# Altium PCB LED_RING_ZERO_12V_00.PcbDoc
Units mm, origin at the board's own origin, x right, y up, seen from the top; angles counter-clockwise.
Board outline 65 x 30 mm, 2 copper layers (Top Layer, Bottom Layer), stack 0.991 mm thick; 39 components, 31 nets, 120 pads, 0 vias.
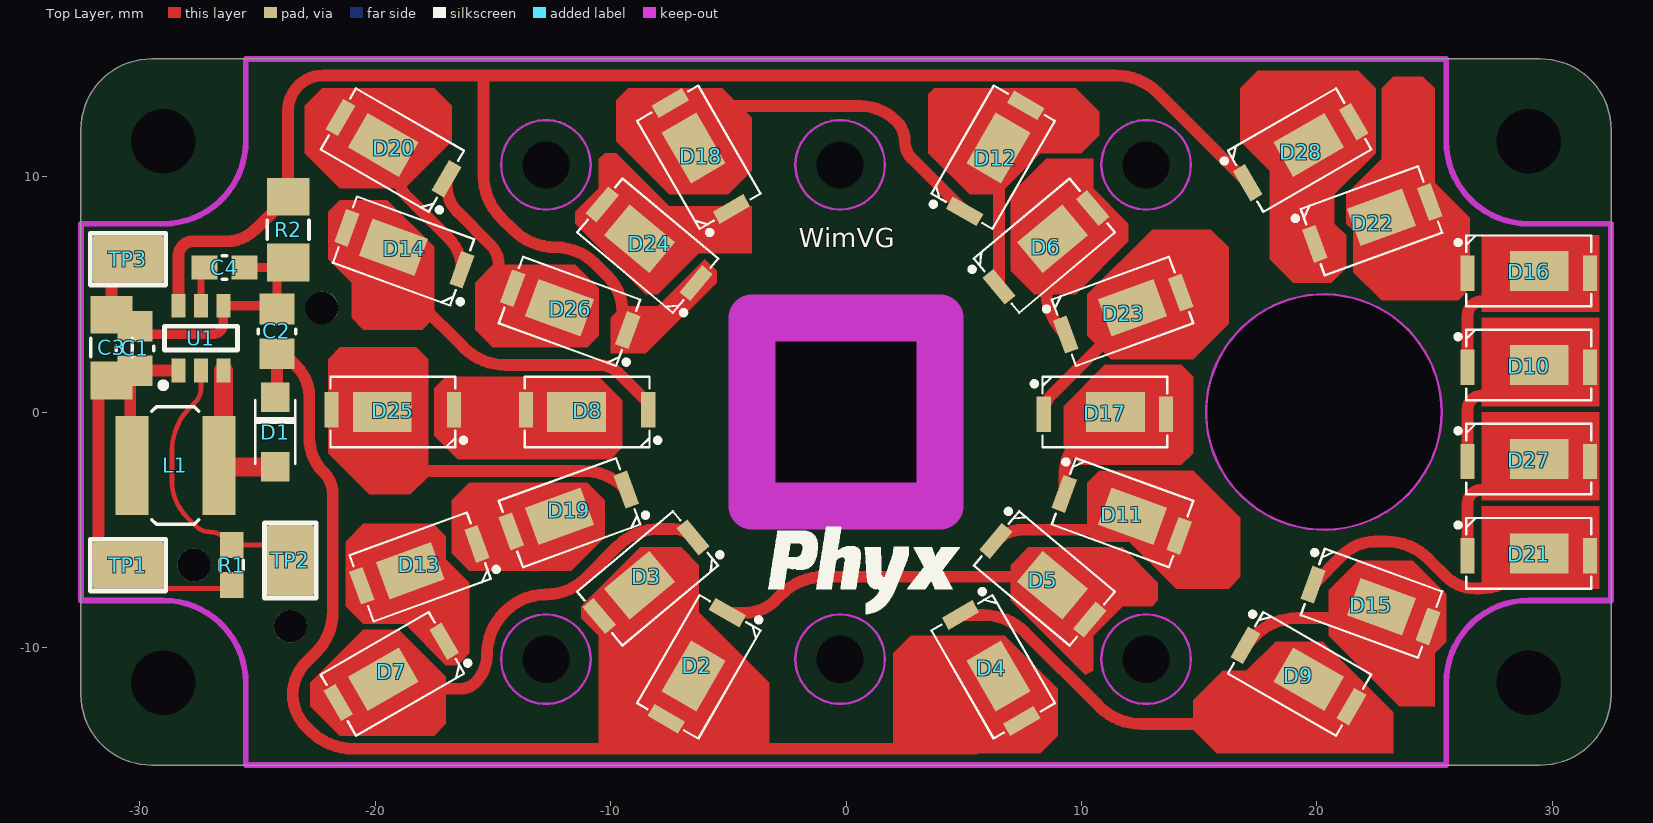
[diagram p0: Top Layer view]
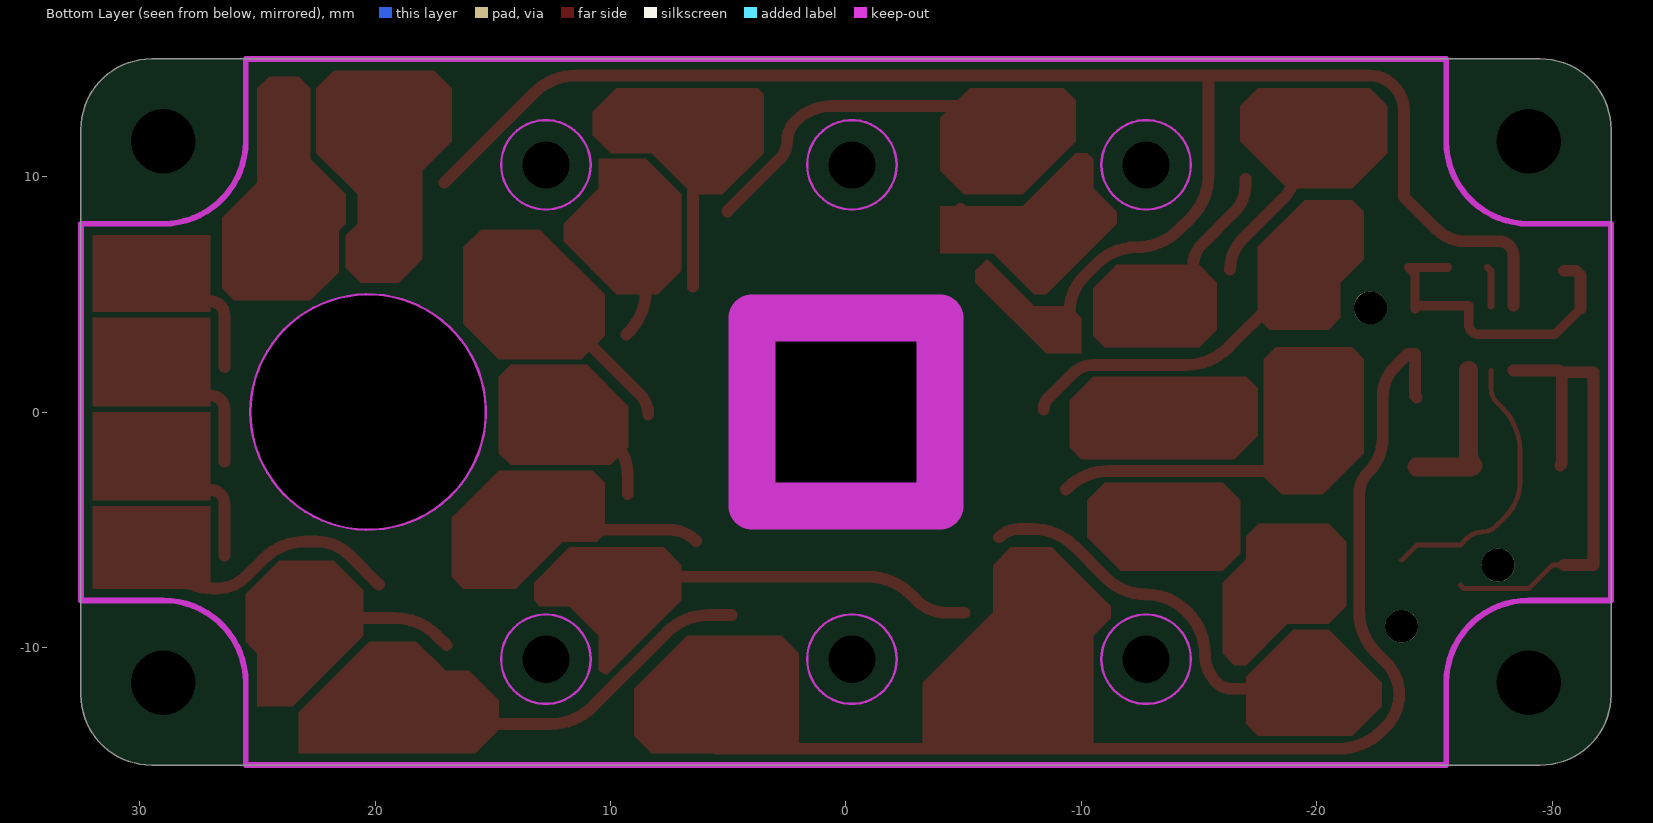
[diagram p1: Bottom Layer view, seen from below]
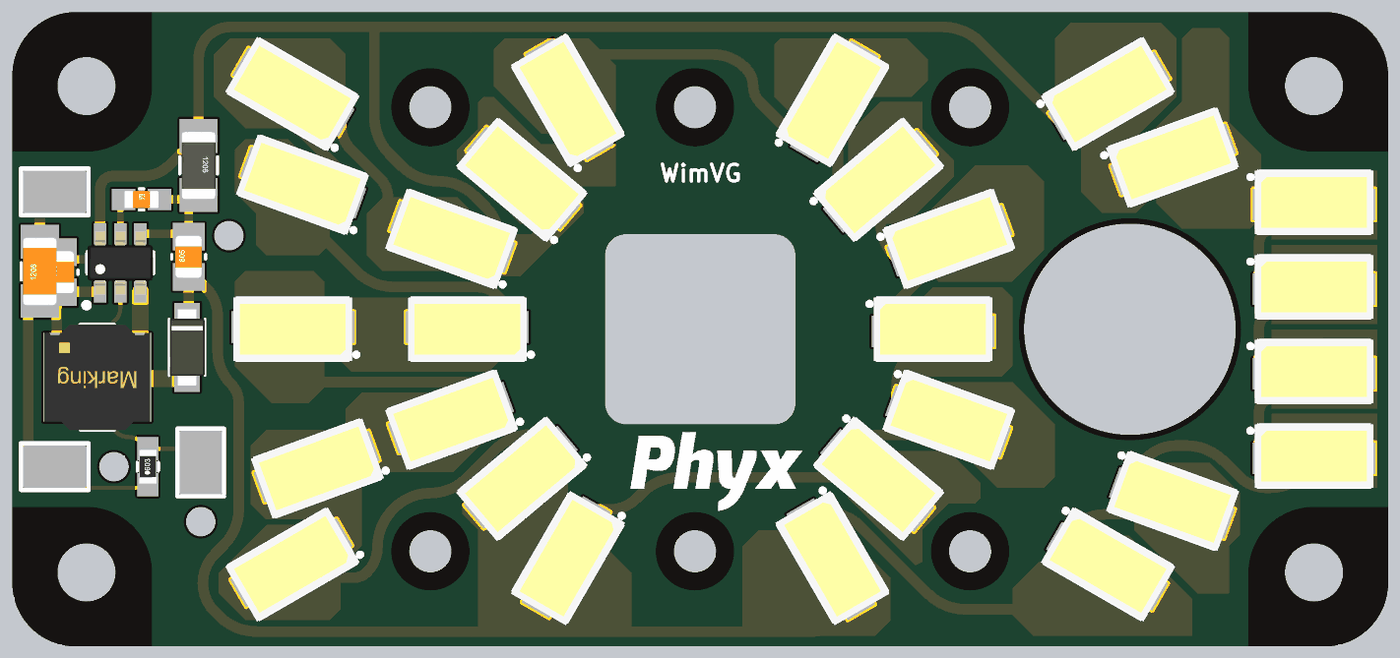
[diagram p2: 3D render of the assembled board from above, using the file's embedded part models]

## Layer stack, top to bottom
Top Solder: solder mask 0.0102, Solder Resist, Dk 3.5
Top Layer: signal copper 0.0356
Dielectric1: core 0.955, Metal, Dk 4.8
Bottom Layer: signal copper (thickness not stored)

## Board outline
-32.5,-12 -32.5,12 cw(c-29.5,12) -29.5,15 29.5,15 cw(c29.5,12) 32.5,12 32.5,-12 cw(c29.5,-12) 29.5,-15 -29.5,-15 cw(c-29.5,-12)
cut-out: 15.3,0 ccw(c20.3,0) 20.3,-5 ccw(c20.3,0) 25.3,0 ccw(c20.3,0) 20.3,5 ccw(c20.3,0)
cut-out: -3.5,4.5 3.5,4.5 cw(c3.5,3.5) 4.5,3.5 4.5,-3.5 cw(c3.5,-3.5) 3.5,-4.5 -3.5,-4.5 cw(c-3.5,-3.5) -4.5,-3.5 -4.5,3.5 cw(c-3.5,3.5) -3.5,4.5

## Design rules (kind name [scope] priority, off if disabled: settings)
Clearance Clearance_GND_POLY [InNamedPolygon('B_GND')] p1: gap=0.4 ignorepadtopadclearanceinfootprint=FALSE except(0: Arc-Hole Track-Hole SMDPad-Hole THPad-Hole Via-Hole Fill-Hole Poly-Hole Region-Hole Text-Hole)
Clearance [All] p2: gap=0.2 ignorepadtopadclearanceinfootprint=FALSE except(0: Arc-Hole Track-Hole SMDPad-Hole THPad-Hole Via-Hole Fill-Hole Poly-Hole Region-Hole Text-Hole)
HoleSize [All] p1: absolutevalues=TRUE maxlimit=10 minlimit=0.025 maxpercent=80.000 minpercent=20.000
PolygonConnect PolygonConnect_VIA [IsVia] p1: connectstyle=Direct reliefconductorwidth=0.254 reliefentries=4 polygonreliefangle="90 Angle" airgapwidth=0.254
PolygonConnect [All] p2: connectstyle=Relief reliefconductorwidth=0.254 reliefentries=4 polygonreliefangle="90 Angle" airgapwidth=0.254
RoutingVias [All] p1: holewidth=0.3 width=0.7 viastyle="Through Hole" minholewidth=0.3 minwidth=0.7 maxholewidth=0.6 maxwidth=1.2
SilkToSolderMaskClearance SilkscreenOverComponentPads [IsPad] p1: minsilkscreentomaskgap=0.254 clearancetoexposedcopper=TRUE
SolderMaskExpansion [All] p1: expansion=0.102
Width [All] p1: maxlimit=2 minlimit=0.15 preferedwidth=0.25
28 further rules are at their usual default settings.

## Components (designator, comment, footprint, x,y, rotation, side; value= is the part's Value field where it differs from the comment)
C1 "CAP_CERAMIC" C0805_N -30.2,2.7 r90 top value="4u7F 25V"
C2 "CAP_CERAMIC" C0805_N -24.171,3.426 r90 top value="1uF 50V"
C3 "CAP_CERAMIC" C1206_N -31.2,2.739 r90 top value="10uF 25V"
C4 "CAP_CERAMIC" C0603_N -26.4,6.139 r0 top value="220nF 50V"
D1 "MBR0540T3G Schottky ULTRAFAST, 500MA, 40V" ON_SOD-123FL -24.246,-0.856 r270 top value=MBR0540T3G
D2 "5630 5630AZLxx Lite ON LED" LED_LM561A -6.25,-10.825 r60 top value=LTW-5630AZL27
D3 "5630 5630AZLxx Lite ON LED" LED_LM561A -8.426,-7.071 r40 top value=LTW-5630AZL27
D4 "5630 5630AZLxx Lite ON LED" LED_LM561A 6.25,-10.825 r120 top value=LTW-5630AZL27
D5 "5630 5630AZLxx Lite ON LED" LED_LM561A 8.426,-7.071 r140 top value=LTW-5630AZL27
D6 "5630 5630AZLxx Lite ON LED" LED_LM561A 8.426,7.071 r220 top value=LTW-5630AZL27
D7 "5630 5630AZLxx Lite ON LED" LED_LM561A -19.269,-11.125 r30 top value=LTW-5630AZL27
D8 "5630 5630AZLxx Lite ON LED" LED_LM561A -11,0 r0 top value=LTW-5630AZL27
D9 "5630 5630AZLxx Lite ON LED" LED_LM561A 19.269,-11.125 r150 top value=LTW-5630AZL27
D10 "5630 5630AZLxx Lite ON LED" LED_LM561A 29,2 r180 top value=LTW-5630AZL27
D11 "5630 5630AZLxx Lite ON LED" LED_LM561A 11.746,-4.275 r160 top value=LTW-5630AZL27
D12 "5630 5630AZLxx Lite ON LED" LED_LM561A 6.25,10.825 r240 top value=LTW-5630AZL27
D13 "5630 5630AZLxx Lite ON LED" LED_LM561A -18.089,-6.584 r20 top value=LTW-5630AZL27
D14 "5630 5630AZLxx Lite ON LED" LED_LM561A -18.794,6.84 r340 top value=LTW-5630AZL27
D15 "5630 5630AZLxx Lite ON LED" LED_LM561A 22.318,-8.123 r160 top value=LTW-5630AZL27
D16 "5630 5630AZLxx Lite ON LED" LED_LM561A 29,6 r180 top value=LTW-5630AZL27
D17 "5630 5630AZLxx Lite ON LED" LED_LM561A 11,0 r180 top value=LTW-5630AZL27
D18 "5630 5630AZLxx Lite ON LED" LED_LM561A -6.25,10.825 r300 top value=LTW-5630AZL27
D19 "5630 5630AZLxx Lite ON LED" LED_LM561A -11.746,-4.275 r20 top value=LTW-5630AZL27
D20 "5630 5630AZLxx Lite ON LED" LED_LM561A -19.269,11.125 r330 top value=LTW-5630AZL27
D21 "5630 5630AZLxx Lite ON LED" LED_LM561A 29,-6 r180 top value=LTW-5630AZL27
D22 "5630 5630AZLxx Lite ON LED" LED_LM561A 22.318,8.123 r200 top value=LTW-5630AZL27
D23 "5630 5630AZLxx Lite ON LED" LED_LM561A 11.746,4.275 r200 top value=LTW-5630AZL27
D24 "5630 5630AZLxx Lite ON LED" LED_LM561A -8.426,7.071 r320 top value=LTW-5630AZL27
D25 "5630 5630AZLxx Lite ON LED" LED_LM561A -19.25,0 r0 top value=LTW-5630AZL27
D26 "5630 5630AZLxx Lite ON LED" LED_LM561A -11.746,4.275 r340 top value=LTW-5630AZL27
D27 "5630 5630AZLxx Lite ON LED" LED_LM561A 29,-2 r180 top value=LTW-5630AZL27
D28 "5630 5630AZLxx Lite ON LED" LED_LM561A 19.269,11.125 r210 top value=LTW-5630AZL27
L1 "TYS5020100M-10" LAIRD_TYS5020 -28.488,-2.27 r0 top value=10uH
R1 "RESISTOR" R0603_N -26.1,-6.5 r90 top value=0R
R2 "RESISTOR" R1206 -23.7,7.75 r270 top value=0R68
TP1 "TEST_PAD" TP_2x3mm -30.5,-6.5 r0 top value="NO BOM"
TP2 "TEST_PAD" TP_2x3mm -23.6,-6.3 r270 top value="NO BOM"
TP3 "TEST_PAD" TP_2x3mm -30.5,6.5 r180 top value="NO BOM"
U1 "TPS61165 38-V Boost WLED Driver with PWM" TI_DBV_R-PDSO-G6 -27.4,3.139 r90 top value=TPS61165DBV

## Footprints (in the part's own frame and the unit in brackets; to place one, negate y for a bottom-side part, rotate by r counter-clockwise, add the part's x,y. Pads: shape width x height; smd on the part's side, far side on the other; paste and mask are expansions set on the pad)
C0603_N [mm] "Low density"
  rect 1.1x1 smd: 1(-0.85,0) 2(0.85,0)
  silkscreen extent -0.1,-0.5 0.1,0.5, body extent -0.8,-0.4 0.8,0.4, height 0.3
C0805_N [mm] "Low density"
  rect 1.3x1.5 smd: 1(-0.95,0) 2(0.95,0)
  silkscreen extent -0.1,-0.8 0.1,0.8, body extent -1,-0.62 1,0.63, height 0.78
C1206_N [mm] "low density"
  rect 1.6x1.8 smd: 1(-1.4,0) 2(1.4,0)
  silkscreen extent -0.4,-0.89 0.4,0.89, body extent -1.6,-0.8 1.6,0.8, height 1
LAIRD_TYS5020 [mm] "Laird TYS5020 5x5x2mm inductor"
  rect 1.4x4.2 smd: 1(-1.85,0) 2(1.85,0)
  silkscreen extent -1,-2.5 1,2.5, body extent -2.5,-2.5 2.5,2.5, height 2
LED_LM561A [mm] "LM561"
  rect 0.6x1.5 smd: 1(2.6,0.1) 2(-2.6,0.1)
  rect 2.5x1.7 smd: 3(-0.45,0)
  silkscreen extent -2.65,-1.5 3.1,1.5, body extent -2.8,-1.5 2.8,1.5, height 0.95
ON_SOD-123FL [mm] "ON_SOD-123FL"
  rect 1.25x1.22 smd: 1(-1.475,0) 2(1.475,0)
  silkscreen extent -1.35,-0.85 1.35,0.85, body extent -1.8,-0.82 1.8,0.83, height 0.95
R0603_N [mm] "Low density"
  rect 1.1x1 smd: 1(-0.85,0) 2(0.85,0)
  silkscreen extent -0.2,-0.5 0.2,0.5, body extent -0.8,-0.41 0.8,0.41, height 0.45
R1206 [mm]
  rect 1.6x1.8 smd: 1(-1.4,0) 2(1.4,0)
  silkscreen extent -0.4,-0.89 0.4,0.89, body extent -1.6,-0.8 1.6,0.8, height 1
TI_DBV_R-PDSO-G6 [mm] "SOT23, 6-Leads, Body 2,90x2,80mm, Pitch 0,95mm, IPC Medium Density"
  rect 1x0.6 smd: 1(-1.375,0.95) 2(-1.375,0) 3(-1.375,-0.95) 4(1.375,-0.95) 5(1.375,0) 6(1.375,0.95)
  silkscreen extent -2.12,-1.55 0.5,1.72, body extent -1.5,-1.55 1.5,1.55, height 1.4
TP_2x3mm [mm] "2 x 3 mm pad"
  rrect10% 3x2 smd mask+0.03: 1(0,0)
  silkscreen extent -1.6,-1.1 1.6,1.1

## Part data
C1: library part "CAP # 4u7F 25V 0805", "Capacitor Ceramic", Supplier Part Number 1=2362111, Supplier 1=Farnell
C2: library part "CAP # 1uF 50V 0805", "Capacitor Ceramic", Supplier Part Number 1=1845750, Supplier 1=Farnell
C3: library part "CAP # 10uF 25V 1206", "Capacitor Ceramic", Supplier Part Number 1=2320887, Supplier 1=Farnell
C4: library part "CAP # 220nF 50V 0603", "Capacitor Ceramic", Supplier Part Number 1=2346906, Supplier 1=Farnell
D1: library part "Schottky # MBR0540T3G", "=Description", Supplier Part Number 1=2101839, Supplier 1=Farnell
D2 D3 D4 D5 D6 D7 D8 D9 D10 D11 D12 D13 D14 D15 D16 D17 D18 D19 D20 D21 D22 D23 D24 D25 D26 D27 D28: library part "LED # LiteOn LTW-5630AZL27", "=Description", Supplier Part Number 1=160-2091-1-ND, Supplier 1=Digikey
L1: library part "IND # 10uH TYS5020100M-10", Supplier Part Number 1=2292527, Supplier 1=Farnell
R1: library part "RES # 0R 0603", Supplier Part Number 1=2447743, Supplier 1=Farnell
R2: library part "RES # 0R68 1206", Supplier Part Number 1=2008307, Supplier 1=Farnell
TP1 TP2 TP3: library part "TP # 2x3mm"
U1: library part "LED_DRVR # TPS61165", "=Description", Supplier Part Number 1=2323441, Supplier 1=Farnell

## Free pads (board coordinates)
  round 1.3 hole 2.75 unplated mask+2.45: 0(-29,-11.5) 0(-29,11.5) 0(29,-11.5) 0(29,11.5)
  round 1.4 hole 1.4 unplated: 0(-27.7,-6.5) 0(-23.6,-9.1) 0(-22.271,4.426)
  round 1.3 hole 2 unplated mask+1.2: 0(-12.75,-10.5) 0(-12.75,10.5) 0(-0.25,-10.5) 0(-0.25,10.5) 0(12.75,-10.5) 0(12.75,10.5)
  round 10 hole 10 unplated mask+0.25: 3(20.3,0)

## Nets (pads, with @x,y where several pads share a name; then routed paths per layer and width w, separated by ;. In a path a pad name is that pad's centre, name@x,y a point inside that pad or via, vN(x,y) a via of type N, cw(c..) or ccw(c..) an arc to the next point about the centre after c; other vN are vias at no path point)
GND: C1.2 C2.2 C3.2 C4.2 R2.2 TP3.1 U1.4 | length 14.3
  Top Layer w0.4: C3.2@-31.2,4.389 -30.111,3.3 -26.878,3.3 ccw(c-26.878,3.728) -26.45,3.728 U1.4 -24.309,4.514 C2.2 -24.171,5.879 -23.911,6.139 C4.2
  Top Layer w0.5: C3.2@-31.2,4.389 -31.2,5.8 -31,6 TP3.1@-30.5,6
LED_A: C2.1 D1.1 D2.2 D2.3 D3.2 D3.3 D4.2 D4.3 | length 57.6
  Top Layer w0.5: D1.1 -24.171,0.694 C2.1 -23.871,2.476 -23.335,1.94 cw(c-24.628,0.648) -23.334,1.939 cw(c-24.628,0.648) -22.8,0.648 -22.8,-1.076 ccw(c-20.69,-1.076) -22.182,-2.568 cw(c-23.105,-3.49) -21.8,-3.49 -21.8,-8.475 cw(c-24.275,-8.475) -22.525,-10.225 -22.934,-10.634 ccw(c-21.569,-12) -23.5,-12 ccw(c-21.569,-12) -22.934,-13.366 ; -22.934,-13.366 -22.744,-13.556 ccw(c-20.948,-11.76) -20.948,-14.3 -10,-14.3 ; D3.2 cw(c-11.647,-9.83) -10,-9.83 -10,-14.3 ; D2.2 -7.238,-13.426 cw(c-7.812,-14) -7,-14 -7,-14.3 ; D4.2 7.034,-13.556 cw(c5.238,-11.76) 5.238,-14.3 -7,-14.3 ; -10,-14.3 -7,-14.3
LED_C: D24.1 D26.1 D28.1 R2.1 U1.6 | length 68.9
  Top Layer w0.5: U1.6 -28.35,6.65 cw(c-27.75,6.65) -27.75,7.25 -26.307,7.25 ccw(c-26.307,8.957) -25.1,7.75 R2.1 -23.7,12.8 cw(c-22.2,12.8) -22.2,14.3 -15.4,14.3 ; D26.1@-9.5,3.5 -9.5,4.266 ccw(c-11.63,4.266) -10.124,5.772 -10.647,6.296 ccw(c-12.348,4.595) -12.348,7 cw(c-12.348,9.54) -14.144,7.744 -14.656,8.256 cw(c-12.86,10.052) -15.4,10.052 -15.4,14.3 ; D28.1 13.25,13.556 ccw(c11.454,11.76) 11.454,14.3 -15.4,14.3
NetC4_1: C4.1 U1.5 | length 1.7
  Top Layer w0.3: U1.5 -27.4,5.989 C4.1
NetD1_2: D1.2 L1.2 U1.3 | length 6.5
  Top Layer w0.8: U1.3 -26.45,-1.815 cw(c-27.093,-1.815) L1.2 ccw(c-26.492,-2.123) -26.492,-2.331 D1.2
NetD2_1: D2.1 D5.2 D5.3 | length 14.3
  Top Layer w0.5: D2.1 -4.264,-8.524 ccw(c-4.264,-6.736) -3,-8 -2.744,-7.744 cw(c-0.948,-9.54) -0.948,-7 7.902,-7 cw(c7.902,-8.229) D5.3
NetD3_1: D3.1 D7.2 D7.3 | length 16.7
  Top Layer w0.5: D7.3 ccw(c-18.693,-10.384) -18.693,-11.75 -16.363,-11.75 ccw(c-16.363,-10.874) -15.743,-11.493 ccw(c-16.935,-10.302) -15.25,-10.302 cw(c-12.71,-10.302) -14.506,-8.506 -14.457,-8.457 cw(c-12.75,-10.164) -12.75,-7.75 ccw(c-12.75,-5.336) -11.043,-7.043 -9.708,-5.708 cw(c-7.912,-7.504) -7.912,-4.964 -7.364,-4.964 cw(c-7.364,-6.188) D3.1
NetD4_1: D4.1 D9.2 D9.3 | length 17.1
  Top Layer w0.5: D4.1 5.822,-8.624 cw(c5.822,-11.164) 7.618,-9.368 10.756,-12.506 ccw(c12.552,-10.71) 12.552,-13.25 15.428,-13.25 ccw(c15.428,-10.71) 17.224,-12.506 17.636,-12.094 cw(c19.432,-13.89) 19.432,-11.35 D9.3
NetD5_1: D5.1 D11.2 D11.3 | length 6.1
  Top Layer w0.5: D5.1 cw(c7.52,-6.625) 7.52,-5 10.791,-5 ccw(c10.791,-3.051) D11.3
NetD6_1: D6.1 D12.2 D12.3 | length 5.9
  Top Layer w0.5: D12.3 cw(c6.417,11.157) 6.499,11.157 D6.1
NetD6_2: D6.2 D6.3 D23.1 | length 4.4
  Top Layer w0.5: D6.3 ccw(c9.426,6.705) 8.5,6.705 8.5,5.181 ccw(c11.04,5.181) 9.244,3.385 D23.1
NetD7_1: D7.1 D13.2 D13.3
NetD8_1: D8.1 D14.2 D14.3 | length 14.3
  Top Layer w0.5: D14.3 -19.05,6.827 cw(c-20.377,5.5) -18.5,5.5 ccw(c-17.293,5.5) -18.147,4.647 -16.244,2.744 ccw(c-14.448,4.54) -14.448,2 -10.5,2 cw(c-10.5,0.793) -9.647,1.647 -8.612,0.612 cw(c-9.124,0.1) D8.1
NetD8_2: D8.2 D8.3 D25.1
NetD9_1: D9.1 D15.2 D15.3 | length 6.3
  Top Layer w0.5: D9.1 17.385,-9.494 cw(c19.181,-11.29) 19.181,-8.75 21.598,-8.75 ccw(c21.598,-7.135) D15.3
NetD10_1: D10.1 D16.2 D16.3 | length 6.3
  Top Layer w0.5: D10.1 26.4,4.1 cw(c27,4.1) 27,4.7 28.15,4.7 ccw(c28.15,6) D16.3
NetD10_2: D10.2 D10.3 D27.1 | length 6.3
  Top Layer w0.5: D27.1 26.4,0.1 cw(c27,0.1) 27,0.7 28.15,0.7 ccw(c28.15,2) D10.3
NetD11_1: D11.1 D17.2 D17.3 | length 4.5
  Top Layer w0.5: D11.1 9.269,-2.765 cw(c11.765,-2.765) 10,-1 10.682,-0.318 cw(c11.45,-1.086) D17.3
NetD12_1: D12.1 D18.2 D18.3 | length 14.8
  Top Layer w0.5: D18.3 -6.475,11.353 cw(c-4.853,11.353) -6,12.5 cw(c-4.793,11.293) -4.793,13 0.586,13 cw(c0.586,10.793) 2.146,12.354 cw(c1.293,11.5) 2.5,11.5 ccw(c3.562,11.5) 2.811,10.749 D12.1
NetD13_1: D13.1 D19.2 D19.3
NetD14_1: D14.1 D20.2 D20.3 | length 6.5
  Top Layer w0.5: D20.3 -19.489,11.18 cw(c-20.669,10) -19,10 ccw(c-17.793,10) -18.646,9.146 -16.862,7.362 cw(c-18.179,6.045) D14.1
NetD15_1: D15.1 D21.2 D21.3 | length 11.4
  Top Layer w0.5: D15.1 21.08,-6.088 cw(c22.5,-7.509) 22.5,-5.5 22.948,-5.5 cw(c22.948,-8.04) 24.744,-6.244 25.47,-6.97 ccw(c26.75,-5.689) 26.75,-7.5 26.898,-7.5 ccw(c26.898,-4.96) 28.694,-6.756 D21.3
NetD16_1: D16.1 D22.2 D22.3
NetD17_1: D17.1 D23.2 D23.3 | length 6
  Top Layer w0.5: D17.1 cw(c9.607,-0.1) 8.754,0.754 11.985,3.985 ccw(c11.541,4.429) D23.3
NetD18_1: D18.1 D24.2 D24.3 | length 4.3
  Top Layer w0.5: D24.3 -7.179,7.36 ccw(c-7.179,9.9) -5.383,8.104 D18.1
NetD19_1: D19.1 D25.2 D25.3 | length 13.1
  Top Layer w0.5: D25.3 -19.7,-2.5 -11.181,-2.5 cw(c-11.181,-5.04) -9.385,-3.244 D19.1
NetD20_1: D20.1 D26.2 D26.3 | length 5.7
  Top Layer w0.5: D20.1 -16.967,9.628 ccw(c-15.372,9.628) -16.5,8.5 -15.104,7.104 cw(c-15.957,6.25) -14.75,6.25 -14.75,5.75 D26.2@-14.25,5.25
NetD21_1: D21.1 D27.2 D27.3 | length 6.3
  Top Layer w0.5: D21.1 26.4,-3.9 cw(c27,-3.9) 27,-3.3 28.15,-3.3 ccw(c28.15,-2) D27.3
NetD22_1: D22.1 D28.2 D28.3
NetR1_2: R1.2 TP2.1 U1.2 | length 11.8
  Top Layer w0.2: U1.2 -27.4,0.996 cw(c-28.219,0.996) -27.64,0.417 -27.884,0.172 ccw(c-26.088,-1.624) -28.628,-1.624 -28.628,-2.942 ccw(c-26.483,-2.942) -28.001,-4.458 ccw(c-26.483,-2.942) -28,-4.459 -27.609,-4.85 ccw(c-27.004,-4.245) -27.004,-5.1 cw(c-27.004,-5.955) -26.4,-5.35 R1.2 -24.25,-5.65 TP2.1
Vin: C1.1 C3.1 L1.1 R1.1 TP1.1 U1.1 | length 21.7
  Top Layer w0.2: TP1.1 -30,-6.5 -29,-7.5 -26.25,-7.5 R1.1
  Top Layer w0.5: TP1.1 -31.75,-6.5 -31.75,1.689 C1.1@-30.4,1.689 ; L1.1 cw(c-30.19,-2.121) -30.4,-2.121 C1.1@-30.4,1.689 ; U1.1 -30.219,1.764 ccw(c-30.219,1.508) C1.1@-30.4,1.689

## Keep-outs
Keep-Out Layer:
  circle w0.1: c12.75,10.5 r1.9
  circle w0.1: c12.75,-10.5 r1.9
  circle w0.1: c-12.75,-10.5 r1.9
  circle w0.1: c-12.75,10.5 r1.9
  circle w0.1: c-0.25,10.5 r1.9
  circle w0.1: c-0.25,-10.5 r1.9
  circle w0.1: c20.3,0 r5
  lines w0.25: -32.5,-8 -32.5,8 -29,8 ccw(c-29,11.5) -25.5,11.5 -25.5,15 25.5,15 25.5,11.5 ccw(c29,11.5) 29,8 32.5,8 32.5,-8 29,-8 ccw(c29,-11.5) 25.5,-11.5 25.5,-15 -25.5,-15 -25.5,-11.5 ccw(c-29,-11.5) -29,-8 -32.5,-8
  lines w2: -4,-4 -4,4 4,4 4,-4 -4,-4
  text ".Layer_Name" at 273,-69 h3.5

## Other copper
Top Layer:
  region net LED_C: -6,6.5 -8,4.5 -9.5,4.5 -10,4 -10,2.5 -8.5,2.5 -5.5,5.5 -5.5,6
  region net NetD14_1: -22.25,13.75 -23,13 -23,11 -21.5,9.5 -18.75,9.5 -16.75,11.5 -16.75,13 -17.5,13.75
  region net NetD8_1: -21.5,9 -19.488,9 -17.5,7.012 -17.5,4 -18,3.5 -20.5,3.5 -21,4 -21,5.5 -22,6.5 -22,8.5
  region net NetD19_1: -21.5,2.75 -22,2.25 -22,-1.75 -20.25,-3.5 -18.5,-3.5 -17.75,-2.75 -17.75,2.25 -18.25,2.75
  region net NetD8_2: -17,1.5 -10.5,1.5 -9.5,0.5 -9.5,-1.5 -10,-2 -16.5,-2 -17.5,-1 -17.5,1
  region net NetD13_1: -10.25,-5.327 -11.673,-6.75 -16,-6.75 -16.75,-6 -16.75,-3.75 -16,-3 -11,-3 -10.25,-3.75
  region net NetD7_1: -21.25,-5.5 -20.5,-4.75 -17.523,-4.75 -17,-5.273 -17,-6.25 -16,-7.25 -16,-10.25 -16.5,-10.75 -17,-10.75 -18.75,-9 -20.5,-9 -21.25,-8.25
  region net NetD3_1: -19,-9.25 -17,-11.25 -17,-13.25 -17.5,-13.75 -21.5,-13.75 -22.75,-12.5 -22.75,-11.5 -20.5,-9.25
  region net LED_A: -6.25,-6.5 -7,-5.75 -8.75,-5.75 -11.25,-8.25 -11.25,-8.75 -10.5,-9.5 -10.5,-14.3 -3.25,-14.3 -3.25,-11.5 -6.25,-8.5
  region net LED_A: 6.75,-9.5 9,-11.75 9,-13.75 8.25,-14.5 2.25,-14.5 2,-14.25 2,-10.25 2.75,-9.5
  region net NetD2_1: 7.75,-5.75 11.75,-5.75 13.25,-7.25 13.25,-8 13,-8.25 11.75,-8.25 10.5,-9.5 10.5,-11 10.167,-11.167 7,-8 7,-6.5
  region net NetD5_1: 10.25,-5.168 10.582,-5.5 12.036,-5.5 14.036,-7.5 16.25,-7.5 16.75,-7 16.75,-4.5 14.75,-2.5 10.75,-2.5 10.25,-3
  region net NetD11_1: 11,2 9.25,0.25 9.25,-1.5 10,-2.25 14.25,-2.25 14.75,-1.75 14.75,1.5 14.25,2
  region net NetD17_1: 10.25,5 10.25,3.25 11.25,2.25 14.75,2.25 16.25,3.75 16.25,7 15.5,7.75 13,7.75
  region net NetD6_2: 8,5 9.75,5 12,7.25 12,8 10.5,9.5 10.5,10.75 9.25,10.75 8.5,10.75 7,9.25 7,6
  region net NetD6_1: 9.75,13.75 10.75,12.75 10.75,11.75 10,11 8.25,11 6.5,9.25 5.25,9.25 3.5,11 3.5,13.5 3.75,13.75
  region net NetD12_1: -9.25,13.75 -5.25,13.75 -4,12.5 -4,10.25 -5,9.25 -7.5,9.25 -9.75,11.5 -9.75,13.25
  region net NetD18_1: -9.75,11 -7.5,8.75 -5.75,8.75 -4,8.75 -4,6.75 -6.25,6.75 -8,5 -8.5,5 -11.5,8 -11.5,8.5 -10.5,9.5 -10.5,10.75 -10.25,11
  region net NetD20_1: -15,2.75 -11,2.75 -10.5,3.25 -10.5,5.25 -11.5,6.25 -15,6.25 -15.75,5.5 -15.75,3.5
  region net NetD9_1: 20.5,-7.57 21.75,-6.32 24.07,-6.32 25.5,-7.75 25.5,-9.75 25,-10.25 25,-12.5 23.5,-12.5 20.5,-9.5
  region net NetD4_1: 18.25,-9.75 20.25,-9.75 23.25,-12.75 23.25,-14.5 15.75,-14.5 14.75,-13.5 14.75,-12.25 16,-11 17,-11
  region net NetD15_1: 32,-7.5 27,-7.5 27,-4 32,-4
  region net NetD21_1: 32,-3.75 27,-3.75 27,0 32,0
  region net NetD10_2: 32,0.25 27,0.25 27,4 32,4
  region net NetD10_1: 32,4.25 27,4.25 27,7.5 32,7.5
  region net NetD22_1: 17.5,14.5 16.75,13.75 16.75,11.5 18,10.25 18,6.5 19,5.5 20.612,5.5 21.25,6.138 21.25,7.5 20.75,8 20.75,9.25 22.5,11 22.5,13.75 21.75,14.5
  region net NetD16_1: 21.25,8 21.557,7.693 21.557,5.943 22.75,4.75 26,4.75 26.5,5.25 26.5,8.25 25,9.75 25,13.75 24.5,14.25 23.25,14.25 22.75,13.75 22.75,10.75 21.25,9.25
  text ".Layer_Name" at 273,-69 h3.5
Bottom Layer:
  text ".Layer_Name" at 273,-69 h3.5

## Silkscreen, mask and mechanical layers (free items; w line width, h text height)
Top Overlay:
  drawing of 4 lines, arcs and shapes, not listed
  text "WimVG" at -2,7 h0.8
  text ".Layer_Name" at 273,-69 h3.5
Bottom Overlay:
  text ".Layer_Name" at 273,-69 h3.5
Top Paste:
  text ".Layer_Name" at 273,-69 h3.5
Bottom Paste:
  text ".Layer_Name" at 273,-69 h3.5
Top Solder:
  rectangle: -32.5,-15 -29,-8.4
  region: -25.9,-15 -25.9,-11.5 -32.5,-11.5 -32.5,-15
  rectangle: -32.5,8.4 -29,15
  region: -32.5,15 -32.5,11.5 -25.9,11.5 -25.9,15
  region: 25.9,15 25.9,11.5 32.5,11.5 32.5,15
  region: 32.5,15 29,15 29,8.4 32.5,8.4
  region: 32.5,-8.4 29,-8.4 29,-15 32.5,-15
  region: 32.5,-15 32.5,-11.5 25.9,-11.5 25.9,-15
  text ".Layer_Name" at 273,-69 h3.5
Bottom Solder:
  text ".Layer_Name" at 273,-69 h3.5
Drill Guide:
  text ".Layer_Name" at 273,-69 h3.5
3D Symbols:
  text ".Layer_Name" at 273,-69 h3.5
Outline:
  circle w0.1: c20.3,0 r5
  lines w0.1: -32.5,-12 ccw(c-29.5,-12) -29.5,-15 29.5,-15 ccw(c29.5,-12) 32.5,-12 32.5,12 ccw(c29.5,12) 29.5,15 -29.5,15 ccw(c-29.5,12) -32.5,12 -32.5,-12 ; -4.5,-3.5 ccw(c-3.5,-3.5) -3.5,-4.5 3.5,-4.5 ccw(c3.5,-3.5) 4.5,-3.5 4.5,3.5 ccw(c3.5,3.5) 3.5,4.5 -3.5,4.5 ccw(c-3.5,3.5) -4.5,3.5 -4.5,-3.5
Comments:
  circle w0.2: c0,0 r3.8
  lines w0.1: -5,0 5,0 ; 0,-5 0,5 ; -4,-4 -4,4 4,4 4,-4 -4,-4
  text ".Layer_Name" at 273,-69 h3.5
Fabrication:
  text ".Layer_Name" at 273,-69 h3.5
Placebound Top:
  text ".Layer_Name" at 273,-69 h3.5
Placebound Bottom:
  text ".Layer_Name" at 273,-69 h3.5
Frame:
  drawing of 15 lines, arcs and shapes, not listed
  text "Document" at 268.5,-54 h2
  text ".PCB_TITLE" at 270,-59.5 h4
  text "Layer Name" at 268.5,-64 h2
  text "Date" at 268.5,-74 h2
  text "Rev" at 308.5,-74 h2
  text ".Print_Date" at 271.5,-79.5 h3.5
  text ".PCB_REV" at 313,-79.5 h4
  text "Desginer" at 218.5,-84 h2
  text "Document" at 268.5,-84 h2
  text ".Pcb_File_Name_No_Path" at 270,-89 h1.5
  text ".PCB_ENGINEER" at 223,-89.5 h4
Assembly Top:
  text ".Layer_Name" at 273,-69 h3.5
Assembly Bottom:
  text ".Layer_Name" at 273,-69 h3.5
Drill Drawing:
  text ".legend" at 56.6,-29.2 h2
  text ".Layer_Name" at 273,-69 h3.5

## Dimensions
4.5,3.5 to -4.5,3.5 on Fabrication
-3.5,4.5 to -3.5,-4.5 on Fabrication
4.5,-3.5 to 3.5,-4.5 on Fabrication
4.5,-3.5 to 3.5,-4.5 on Fabrication
-29.5,15 to -29.5,-15 on Fabrication
-32.5,-12 to 32.5,-12 on Fabrication
32.5,12 to 29.5,15 on Fabrication
32.5,12 to 29.5,15 on Fabrication
-32.5,-15 to -29,-11.5 on Drill Drawing
-32.5,-15 to -29,-11.5 on Drill Drawing